# EAGLE board CT_schematic (EAGLE 7.6.0)

Size 100 x 80 mm. Coordinates in mm from the lower left corner, seen from the top.
Outline: 0,0 100,0 100,80 0,80 0,0
Copper layers (1*16): Top 0.035mm / dielectric 1.5mm / Bottom 0.035mm
Design rules "default": minimum track width 10mil, minimum drill 24mil, track to track 8mil, track to pad 8mil, pad to pad 8mil, via to via 8mil, smd to smd 8mil, copper to edge 40mil, drill to drill 8mil, minimum pad ring 10mil, minimum via ring 8mil, stop-mask expansion 4mil, vias tented up to drill 0mil, thermal gap 10mil

## Footprints (pad centres in the part's own frame; a part is rotated, then mirrored left to right if it is on the bottom)
C0603 = smd 0.8 x 0.8: 1 -0.762,0; 2 0.762,0
C0402 = smd 0.5 x 0.5: 1 -0.508,0; 2 0.508,0
C1206 = smd 1.3 x 1.6: 1 -1.524,0; 2 1.524,0
C0805 = smd 1.2 x 1.3: 1 -1.016,0; 2 1.016,0
2220 = smd 1.85 x 5.5: 1 -2.55,0; 2 2.55,0
C1210 = smd 1.2 x 2.5: 1 -1.524,0; 2 1.524,0
EXV-9H = smd 3.505 x 1.676: 1 -2.857,0; 2 2.857,0
L0603 = smd 0.8 x 0.8: 1 -0.762,0; 2 0.762,0
R0603 = smd 0.8 x 0.8: 1 -0.762,0; 2 0.762,0
DR1040 = smd 1.6 x 3.2: 1 -4.458,0; 2 4.458,0
PJ-037B_PACKAGE = drill 3.7 square: 1 12,0 | drill 3.2 square: 2 6,0
UFBGA176_25 = smd 0.3 x 0.3: A1 -4.55,4.55; A2 -3.9,4.55; A3 -3.25,4.55; A4 -2.6,4.55; A5 -1.95,4.55; A6 -1.3,4.55; A7 -0.65,4.55; A8 0,4.55; A9 0.65,4.55; A10 1.3,4.55; A11 1.95,4.55; A12 2.6,4.55; A13 3.25,4.55; A14 3.9,4.55; A15 4.55,4.55; B1 -4.55,3.9; B2 -3.9,3.9; B3 -3.25,3.9; B4 -2.6,3.9; B5 -1.95,3.9; B6 -1.3,3.9; B7 -0.65,3.9; B8 0,3.9; B9 0.65,3.9; B10 1.3,3.9; B11 1.95,3.9; B12 2.6,3.9; B13 3.25,3.9; B14 3.9,3.9; B15 4.55,3.9; C1 -4.55,3.25; C2 -3.9,3.25; C3 -3.25,3.25; C4 -2.6,3.25; C5 -1.95,3.25; C6 -1.3,3.25; C7 -0.65,3.25; C8 0,3.25; C9 0.65,3.25; C10 1.3,3.25; C11 1.95,3.25; C12 2.6,3.25; C13 3.25,3.25; C14 3.9,3.25; C15 4.55,3.25; D1 -4.55,2.6; D2 -3.9,2.6; D3 -3.25,2.6; D4 -2.6,2.6; D5 -1.95,2.6; D6 -1.3,2.6; D7 -0.65,2.6; D8 0,2.6; D9 0.65,2.6; D10 1.3,2.6; D11 1.95,2.6; D12 2.6,2.6; D13 3.25,2.6; D14 3.9,2.6; D15 4.55,2.6; E1 -4.55,1.95; E2 -3.9,1.95; E3 -3.25,1.95; E4 -2.6,1.95; E12 2.6,1.95; E13 3.25,1.95; E14 3.9,1.95; E15 4.55,1.95; F1 -4.55,1.3; F2 -3.9,1.3; F3 -3.25,1.3; F4 -2.6,1.3; F6 -1.3,1.3; F7 -0.65,1.3; F8 0,1.3; F9 0.65,1.3; F10 1.3,1.3; F12 2.6,1.3; F13 3.25,1.3; F14 3.9,1.3; F15 4.55,1.3; G1 -4.55,0.65; G2 -3.9,0.65; G3 -3.25,0.65; G4 -2.6,0.65; G6 -1.3,0.65; G7 -0.65,0.65; G8 0,0.65; G9 0.65,0.65; G10 1.3,0.65; G12 2.6,0.65; G13 3.25,0.65; G14 3.9,0.65; G15 4.55,0.65; H1 -4.55,0; H2 -3.9,0; H3 -3.25,0; H4 -2.6,0; H6 -1.3,0; H7 -0.65,0; H8 0,0; H9 0.65,0; H10 1.3,0; H12 2.6,0; H13 3.25,0; H14 3.9,0; H15 4.55,0; J1 -4.55,-0.65; J2 -3.9,-0.65; J3 -3.25,-0.65; J4 -2.6,-0.65; J6 -1.3,-0.65; J7 -0.65,-0.65; J8 0,-0.65; J9 0.65,-0.65; J10 1.3,-0.65; J12 2.6,-0.65; J13 3.25,-0.65; J14 3.9,-0.65; J15 4.55,-0.65; K1 -4.55,-1.3; K2 -3.9,-1.3; K3 -3.25,-1.3; K4 -2.6,-1.3; K6 -1.3,-1.3; K7 -0.65,-1.3; K8 0,-1.3; K9 0.65,-1.3; K10 1.3,-1.3; K12 2.6,-1.3; K13 3.25,-1.3; K14 3.9,-1.3; K15 4.55,-1.3; L1 -4.55,-1.95; L2 -3.9,-1.95; L3 -3.25,-1.95; L4 -2.6,-1.95; L12 2.6,-1.95; L13 3.25,-1.95; L14 3.9,-1.95; L15 4.55,-1.95; M1 -4.55,-2.6; M2 -3.9,-2.6; M3 -3.25,-2.6; M4 -2.6,-2.6; M5 -1.95,-2.6; M6 -1.3,-2.6; M7 -0.65,-2.6; M8 0,-2.6; M9 0.65,-2.6; M10 1.3,-2.6; M11 1.95,-2.6; M12 2.6,-2.6; M13 3.25,-2.6; M14 3.9,-2.6; M15 4.55,-2.6; N1 -4.55,-3.25; N2 -3.9,-3.25; N3 -3.25,-3.25; N4 -2.6,-3.25; N5 -1.95,-3.25; N6 -1.3,-3.25; N7 -0.65,-3.25; N8 0,-3.25; N9 0.65,-3.25; N10 1.3,-3.25; N11 1.95,-3.25; N12 2.6,-3.25; N13 3.25,-3.25; N14 3.9,-3.25; N15 4.55,-3.25; P1 -4.55,-3.9; P2 -3.9,-3.9; P3 -3.25,-3.9; P4 -2.6,-3.9; P5 -1.95,-3.9; P6 -1.3,-3.9; P7 -0.65,-3.9; P8 0,-3.9; P9 0.65,-3.9; P10 1.3,-3.9; P11 1.95,-3.9; P12 2.6,-3.9; P13 3.25,-3.9; P14 3.9,-3.9; P15 4.55,-3.9; R1 -4.55,-4.55; R2 -3.9,-4.55; R3 -3.25,-4.55; R4 -2.6,-4.55; R5 -1.95,-4.55; R6 -1.3,-4.55; R7 -0.65,-4.55; R8 0,-4.55; R9 0.65,-4.55; R10 1.3,-4.55; R11 1.95,-4.55; R12 2.6,-4.55; R13 3.25,-4.55; R14 3.9,-4.55; R15 4.55,-4.55
TST-110-05-T-D-RA = drill 1 pad 1.7 square: 1 0,0 | drill 1 pad 1.7: 2 0,2.54; 3 2.54,0; 4 2.54,2.54; 5 5.08,0; 6 5.08,2.54; 7 7.62,0; 8 7.62,2.54; 9 10.16,0; 10 10.16,2.54; 11 12.7,0; 12 12.7,2.54; 13 15.24,0; 14 15.24,2.54; 15 17.78,0; 16 17.78,2.54; 17 20.32,0; 18 20.32,2.54; 19 22.86,0; 20 22.86,2.54
TDFN-8/6MM = smd 0.3 x 0.75: 1 0,0; 2 0.5,0; 3 1,0; 4 1.5,0; 5 1.5,3; 6 1,3; 7 0.5,3; 8 0,3
RTL8201FL-VB-CG = smd 0.27 x 1: 1 0,0; 2 0.5,0; 3 1,0; 4 1.5,0; 5 2,0; 6 2.5,0; 7 3,0; 8 3.5,0; 9 4,0; 10 4.5,0; 11 5,0; 12 5.5,0; 25 5.5,8; 26 5,8; 27 4.5,8; 28 4,8; 29 3.5,8; 30 3,8; 31 2.5,8; 32 2,8; 33 1.5,8; 34 1,8; 35 0.5,8; 36 0,8 | smd 1 x 0.27: 13 6.75,1.25; 14 6.75,1.75; 15 6.75,2.25; 16 6.75,2.75; 17 6.75,3.25; 18 6.75,3.75; 19 6.75,4.25; 20 6.75,4.75; 21 6.75,5.25; 22 6.75,5.75; 23 6.75,6.25; 24 6.75,6.75; 37 -1.25,6.75; 38 -1.25,6.25; 39 -1.25,5.75; 40 -1.25,5.25; 41 -1.25,4.75; 42 -1.25,4.25; 43 -1.25,3.75; 44 -1.25,3.25; 45 -1.25,2.75; 46 -1.25,2.25; 47 -1.25,1.75; 48 -1.25,1.25
7498011122R = smd 0.71 x 2.29: 1 -3.545,-3.18; 2 -2.525,-3.18; 3 -1.505,-3.18; 4 -0.485,-3.18; 5 0.535,-3.18; 6 1.555,-3.18; 8 3.595,-3.18; 9 5.635,-3.18; 10 6.655,-3.18; 11 -6.605,-3.18; 12 -5.585,-3.18 | smd 1.4 x 2.54: 13 -8.51,10.2; 14 8.51,10.2 | hole 1.4: -3.5,0; 3.5,0
RHB32_3P45X3P45 = smd 0.85 x 0.28: 1 -2.475,1.75; 2 -2.475,1.25; 3 -2.475,0.75; 4 -2.475,0.25; 5 -2.475,-0.25; 6 -2.475,-0.75; 7 -2.475,-1.25; 8 -2.475,-1.75; 17 2.475,-1.75; 18 2.475,-1.25; 19 2.475,-0.75; 20 2.475,-0.25; 21 2.475,0.25; 22 2.475,0.75; 23 2.475,1.25; 24 2.475,1.75 | smd 0.28 x 0.85: 9 -1.75,-2.475; 10 -1.25,-2.475; 11 -0.75,-2.475; 12 -0.25,-2.475; 13 0.25,-2.475; 14 0.75,-2.475; 15 1.25,-2.475; 16 1.75,-2.475; 25 1.75,2.475; 26 1.25,2.475; 27 0.75,2.475; 28 0.25,2.475; 29 -0.25,2.475; 30 -0.75,2.475; 31 -1.25,2.475; 32 -1.75,2.475 | smd 3.45 x 3.45: 33 0,0
FCI_10118193-0001LF = smd 0.4 x 1.35: 1 -1.3,2.675; 2 -0.65,2.675; 3 0,2.675; 4 0.65,2.675; 5 1.3,2.675 | smd 1.6 x 1.4: 6 -3.2,2.45; 7 3.2,2.45 | smd 1.9 x 1.9: 8 -1.2,0; 9 1.2,0 | hole 0.5: -3.3,0; 3.3,0
SOT143B = smd 1 x 0.7: 1 -0.75,-1 | smd 0.6 x 0.7: 2 0.95,-1; 3 0.95,1; 4 -0.95,1
ABS07-32.768KHZ-7-T = smd 1.1 x 2.4: 1 -2.5,0; 2 0,0
ABLS-25.000MHZ-B2F-T = smd 5.6 x 2.8: 1 -3.81,0; 2 5.69,0
ASFL1 = smd 1.7 x 1.5: 1 -1.27,-1.1; 2 1.27,-1.1; 3 1.27,1.1; 4 -1.27,1.1
WSON-8 = smd 0.3 x 0.6: 1 -0.75,0; 2 0.05,0; 3 0.85,0; 4 1.65,0; 5 1.65,3.8; 6 0.85,3.8; 7 0.05,3.8; 8 -0.75,3.8 | smd 3 x 2.6: PAD 0.45,1.9
QFN-16_EP = smd 0.805 x 0.3: 1 -1.452,0.75; 2 -1.452,0.25; 3 -1.452,-0.25; 4 -1.452,-0.75; 9 1.452,-0.75; 10 1.452,-0.25; 11 1.452,0.25; 12 1.452,0.75 | smd 0.3 x 0.805: 5 -0.75,-1.452; 6 -0.25,-1.452; 7 0.25,-1.452; 8 0.75,-1.452; 13 0.75,1.452; 14 0.25,1.452; 15 -0.25,1.452; 16 -0.75,1.452 | smd 1.55 x 1.55: 17 0,0
SON-6 = smd 0.55 x 0.3: 1 -0.355,0.5 | smd 0.52 x 0.3: 2 -0.37,0; 3 -0.37,-0.5; 4 0.37,-0.5; 5 0.37,0; 6 0.37,0.5
SW_4-1437565-2 = smd 1.4 x 2.1: 1 -2.23,4.55; 2 -2.23,-4.55; 3 2.23,4.55; 4 2.23,-4.55
LGM67K-G1J2-24-Z = smd 0.8 x 1.4: A -2,0; C 0,0
NC7SZ125M5X = smd 1.3 x 0.7: 1 -1.3,0.95; 2 -1.3,0; 3 -1.3,-0.95; 4 1.3,-0.95; 5 1.3,0.95

## Placement (x,y rotation side)
C1  1e-06  [C0603]  -40.64,80.01 0 top  (outside the outline)
C2  1e-07  [C0603]  -44.45,80.01 0 top  (outside the outline)
C3  1e-07  [C0603]  -48.26,80.01 0 top  (outside the outline)
C4  1e-07  [C0603]  -52.07,80.01 0 top  (outside the outline)
C5  1e-07  [C0603]  -55.88,80.01 0 top  (outside the outline)
C6  1e-07  [C0603]  -59.69,80.01 0 top  (outside the outline)
C7  1e-07  [C0603]  -63.5,80.01 0 top  (outside the outline)
C8  1e-07  [C0603]  -67.31,80.01 0 top  (outside the outline)
C9  1e-07  [C0603]  -71.12,80.01 0 top  (outside the outline)
C10  1e-07  [C0603]  -74.93,80.01 0 top  (outside the outline)
C11  1e-07  [C0603]  -78.74,80.01 0 top  (outside the outline)
C12  1e-07  [C0603]  -82.55,80.01 0 top  (outside the outline)
C13  1e-07  [C0603]  -86.36,80.01 0 top  (outside the outline)
C14  1e-07  [C0603]  -15.24,85.09 0 top  (outside the outline)
C15  1e-07  [C0603]  -19.05,85.09 0 top  (outside the outline)
C16  1e-07  [C0603]  -22.86,85.09 0 top  (outside the outline)
C17  4.7e-06  [C0603]  -29.21,80.01 0 top  (outside the outline)
C18  1e-08  [C0603]  -26.67,85.09 0 top  (outside the outline)
C19  1e-06  [C0603]  -30.48,85.09 0 top  (outside the outline)
C20  1e-07  [C0402]  -64.77,90.17 0 top  (outside the outline)
C21  1e-07  [C0402]  -68.58,90.17 0 top  (outside the outline)
C22  1e-11  [C0402]  -72.39,90.17 0 top  (outside the outline)
C23  1e-11  [C0402]  -76.2,90.17 0 top  (outside the outline)
C24  1e-11  [C0402]  -80.01,90.17 0 top  (outside the outline)
C25  1e-11  [C0402]  -83.82,90.17 0 top  (outside the outline)
C26  1e-07  [C0402]  -87.63,90.17 0 top  (outside the outline)
C27  1e-08  [C0402]  -15.24,95.25 0 top  (outside the outline)
C28  2.2e-08  [C0402]  -60.96,90.17 0 top  (outside the outline)
C29  1e-06  [C0603]  -34.29,85.09 0 top  (outside the outline)
C30  1e-07  [C0402]  -19.05,95.25 0 top  (outside the outline)
C31  1e-08  [C0402]  -22.86,95.25 0 top  (outside the outline)
C32  1e-06  [C0603]  -38.1,85.09 0 top  (outside the outline)
C33  1e-07  [C0402]  -26.67,95.25 0 top  (outside the outline)
C34  1e-08  [C0402]  -30.48,95.25 0 top  (outside the outline)
C35  1e-07  [C0402]  -34.29,95.25 0 top  (outside the outline)
C36  1e-07  [C0402]  -38.1,95.25 0 top  (outside the outline)
C37  1e-07  [C0402]  -41.91,95.25 0 top  (outside the outline)
C38  2.2e-06  [C0603]  -33.02,80.01 0 top  (outside the outline)
C39  1e-07  [C0402]  -45.72,95.25 0 top  (outside the outline)
C40  1e-07  [C0402]  -49.53,95.25 0 top  (outside the outline)
C41  2.2e-06  [C0603]  -36.83,80.01 0 top  (outside the outline)
C42  1e-06  [C0603]  -41.91,85.09 0 top  (outside the outline)
C43  1e-08  [C0402]  -53.34,95.25 0 top  (outside the outline)
C44  1e-08  [C0402]  -57.15,95.25 0 top  (outside the outline)
C45  1e-08  [C0402]  -60.96,95.25 0 top  (outside the outline)
C46  1e-05  [C1206]  -85.09,60.96 0 top  (outside the outline)
C47  1e-05  [C0805]  -46.99,68.58 0 top  (outside the outline)
C48  1e-05  [C0805]  -52.07,68.58 0 top  (outside the outline)
C49  1e-06  [C0603]  -45.72,85.09 0 top  (outside the outline)
C50  1e-07  [C0402]  -64.77,95.25 0 top  (outside the outline)
C51  6.8e-05  [2220]  -62.23,33.02 0 top  (outside the outline)
C52  1e-08  [C0402]  -68.58,95.25 0 top  (outside the outline)
C53  1e-05  [C1206]  -16.51,68.58 0 top  (outside the outline)
C54  1e-05  [C1210]  -78.74,60.96 0 top  (outside the outline)
C55  1e-07  [C0402]  -72.39,95.25 0 top  (outside the outline)
C56  0.0001  [EXV-9H]  -54.61,53.34 0 top  (outside the outline)
C57  0.0001  [EXV-9H]  -66.04,53.34 0 top  (outside the outline)
C58  1e-08  [C0402]  -76.2,95.25 0 top  (outside the outline)
C59  1e-08  [C0402]  -80.01,95.25 0 top  (outside the outline)
C60  1e-08  [C0402]  -83.82,95.25 0 top  (outside the outline)
C61  1e-08  [C0402]  -87.63,95.25 0 top  (outside the outline)
F1  240.0  [L0603]  -49.53,85.09 0 top  (outside the outline)
I1  97.0  [R0603]  -53.34,85.09 0 top  (outside the outline)
I5  3.8e-06  [DR1040]  -38.1,34.29 0 top  (outside the outline)
J1  PJ-037B  [PJ-037B_PACKAGE]  -77.47,7.62 0 top  (outside the outline)
R2  1000.0  [R0603]  -57.15,85.09 0 top  (outside the outline)
R4  4700.0  [R0603]  -60.96,85.09 0 top  (outside the outline)
R5  4700.0  [R0603]  -64.77,85.09 0 top  (outside the outline)
R6  4700.0  [R0603]  -68.58,85.09 0 top  (outside the outline)
R7  2200.0  [R0603]  -72.39,85.09 0 top  (outside the outline)
R8  2200.0  [R0603]  -76.2,85.09 0 top  (outside the outline)
R9  2200.0  [R0603]  -80.01,85.09 0 top  (outside the outline)
R10  2200.0  [R0603]  -83.82,85.09 0 top  (outside the outline)
R11  10000.0  [R0603]  -82.55,68.58 0 top  (outside the outline)
R12  10000.0  [R0603]  -15.24,74.93 0 top  (outside the outline)
R13  10000.0  [R0603]  -20.32,74.93 0 top  (outside the outline)
R14  10000.0  [R0603]  -25.4,74.93 0 top  (outside the outline)
R15  10000.0  [R0603]  -30.48,74.93 0 top  (outside the outline)
R16  10000.0  [R0603]  -35.56,74.93 0 top  (outside the outline)
R17  0.1  [R0603]  -15.24,90.17 0 top  (outside the outline)
R18  0.1  [R0603]  -19.05,90.17 0 top  (outside the outline)
R19  200.0  [R0603]  -22.86,90.17 0 top  (outside the outline)
R20  200.0  [R0603]  -26.67,90.17 0 top  (outside the outline)
R21  2490.0  [R0603]  -30.48,90.17 0 top  (outside the outline)
R22  4700.0  [R0603]  -34.29,90.17 0 top  (outside the outline)
R23  10000.0  [R0603]  -40.64,74.93 0 top  (outside the outline)
R24  10000.0  [R0603]  -45.72,74.93 0 top  (outside the outline)
R25  10000.0  [R0603]  -50.8,74.93 0 top  (outside the outline)
R26  10000.0  [R0603]  -55.88,74.93 0 top  (outside the outline)
R27  10000.0  [R0603]  -60.96,74.93 0 top  (outside the outline)
R28  10000.0  [R0603]  -66.04,74.93 0 top  (outside the outline)
R29  10000.0  [R0603]  -71.12,74.93 0 top  (outside the outline)
R30  10000.0  [R0603]  -76.2,74.93 0 top  (outside the outline)
R31  100000.0  [R0603]  -57.15,68.58 0 top  (outside the outline)
R32  200.0  [R0603]  -38.1,90.17 0 top  (outside the outline)
R33  1000.0  [R0603]  -41.91,90.17 0 top  (outside the outline)
R34  20000.0  [R0603]  -81.28,74.93 0 top  (outside the outline)
R35  39000.0  [R0603]  -86.36,74.93 0 top  (outside the outline)
R36  300000.0  [R0603]  -62.23,68.58 0 top  (outside the outline)
R37  100000.0  [R0603]  -67.31,68.58 0 top  (outside the outline)
R38  2231.0  [R0603]  -45.72,90.17 0 top  (outside the outline)
R39  1000.0  [R0603]  -49.53,90.17 0 top  (outside the outline)
R40  10000.0  [R0603]  -15.24,80.01 0 top  (outside the outline)
R41  10000.0  [R0603]  -20.32,80.01 0 top  (outside the outline)
R42  82000.0  [R0603]  -25.4,80.01 0 top  (outside the outline)
R43  300000.0  [R0603]  -72.39,68.58 0 top  (outside the outline)
R44  120000.0  [R0603]  -77.47,68.58 0 top  (outside the outline)
U1  STM32F207IFH6  [UFBGA176_25]  -38.1,6.35 0 top  (outside the outline)
U2  TST-110-05-T-D-RA  [TST-110-05-T-D-RA]  -46.99,52.07 0 top  (outside the outline)
U3  24AA64T-I/MNY  [TDFN-8/6MM]  -54.61,33.02 0 top  (outside the outline)
U4  RTL8201FL-VB-CG  [RTL8201FL-VB-CG]  -60.96,3.81 0 top  (outside the outline)
U5  7498011122R  [7498011122R]  -22.86,7.62 0 top  (outside the outline)
U6  TUSB1210BRHBR  [RHB32_3P45X3P45]  -38.1,62.23 0 top  (outside the outline)
U7  10118193-0001LF  [FCI_10118193-0001LF]  -72.39,44.45 0 top  (outside the outline)
U8  prtr5v0u2ax  [SOT143B]  -24.13,100.33 0 top  (outside the outline)
U9  ABS07-32.768KHZ-7-T  [ABS07-32.768KHZ-7-T]  -58.42,62.23 0 top  (outside the outline)
U10  ABLS-25.000MHZ-B2F-T  [ABLS-25.000MHZ-B2F-T]  -26.67,62.23 0 top  (outside the outline)
U11  ASFL1-25MHZ-NCS  [ASFL1]  -46.99,44.45 0 top  (outside the outline)
U12  ASFL1-26MHZ-NCS  [ASFL1]  -63.5,44.45 0 top  (outside the outline)
U13  LP3878SDX-ADJ/NOPB  [WSON-8]  -83.82,31.75 0 top  (outside the outline)
U14  LTC3601EUD#PBF  [QFN-16_EP]  -54.61,90.17 0 top  (outside the outline)
U15  LP3878SDX-ADJ/NOPB  [WSON-8]  -30.48,43.18 0 top  (outside the outline)
U16  TPS3895ADRYR  [SON-6]  -27.94,99.06 0 top  (outside the outline)
U17  4-1437565-2  [SW_4-1437565-2]  -27.94,34.29 0 top  (outside the outline)
U18  Q65110A2395  [LGM67K-G1J2-24-Z]  -67.31,62.23 0 top  (outside the outline)
U19  nc7sz125m5x  [NC7SZ125M5X]  -21.59,68.58 0 top  (outside the outline)
U20  nc7sz125m5x  [NC7SZ125M5X]  -27.94,68.58 0 top  (outside the outline)
U21  nc7sz125m5x  [NC7SZ125M5X]  -34.29,68.58 0 top  (outside the outline)
U22  nc7sz125m5x  [NC7SZ125M5X]  -40.64,68.58 0 top  (outside the outline)

## Library data of the parts
C1-C61 F1 I1 I5 J1 R2 R4-R44 U1-U22 = circuit_tree

## Nets
CLK_CRYSTAL_U1_E1: C22.1 U1.E1 U9.1
CLK_CRYSTAL_U1_F1: C23.1 U1.F1 U9.2
CLK_CRYSTAL_U1_G1: C24.1 U1.G1 U10.1
CLK_CRYSTAL_U1_H1: C25.1 U1.H1 U10.2
CLK_U4_43: U4.43 U11.3
CLK_U6_1: U6.1 U12.3
GND: C1.2 C2.2 C3.2 C4.2 C5.2 C6.2 C7.2 C8.2 C9.2 C10.2 C11.2 C12.2 C13.2 C14.2 C15.2 C16.2 C17.2 C18.2 C19.2 C20.2 C21.2 C22.2 C23.2 C24.2 C25.2 C26.2 C27.2 C28.2 C29.2 C30.2 C31.2 C32.2 C33.2 C34.2 C35.2 C36.2 C37.2 C38.2 C39.2 C40.2 C41.2 C42.2 C43.2 C44.2 C45.2 C46.2 C47.2 C48.2 C49.2 C51.1 C51.2 C52.2 C53.2 C54.2 C55.2 C56.2 C57.2 C58.2 C59.2 C60.2 C61.2 J1.2 R2.2 R11.2 R14.2 R16.2 R17.2 R18.2 R21.2 R23.2 R24.2 R26.2 R33.2 R34.2 R36.2 R39.2 R42.2 R44.2 U1.D5 U1.D7 U1.D8 U1.D9 U1.F2 U1.F6 U1.F7 U1.F8 U1.F9 U1.F10 U1.F12 U1.G2 U1.G6 U1.G7 U1.G8 U1.G9 U1.G10 U1.G12 U1.H6 U1.H7 U1.H8 U1.H9 U1.H10 U1.H12 U1.J6 U1.J7 U1.J8 U1.J9 U1.J10 U1.K6 U1.K7 U1.K8 U1.K9 U1.K10 U1.M1 U1.M8 U1.M9 U1.N1 U2.4 U2.6 U2.8 U2.10 U2.12 U2.14 U2.16 U2.18 U2.20 U3.4 U3.7 U4.7 U4.20 U4.33 U4.42 U4.47 U5.9 U6.33 U7.5 U7.6 U7.7 U7.8 U7.9 U8.1 U11.2 U12.2 U13.3 U13.PAD U14.1 U14.9 U14.17 U15.3 U15.PAD U16.2 U18.C U19.2 U19.3 U20.1 U20.3 U21.1 U21.3 U22.1 U22.3
NET_U1_A5: R7.1 U1.A5 U3.6
NET_U1_B4: R8.1 U1.B4 U3.5
NET_U1_D6: R11.1 U1.D6
NET_U1_F13: C21.1 U1.F13
NET_U1_J1: R5.1 U1.J1 U21.4
NET_U1_L4: R12.1 U1.L4
NET_U1_M3: R9.1
NET_U1_P2: R10.1
NET_U1_R1: C18.1 C19.1 F1.1 U1.P1 U1.R1
NET_U1_R14: U18.A
NET_U1_R15: U17.3 U17.4
NET_U3_1: R14.1 U3.1
NET_U3_2: R15.1 U3.2
NET_U3_3: R16.1 U3.3
NET_U4_6: C29.1 C30.1 C31.1 I1.1 U4.6 U4.41
NET_U4_10: R26.1 U4.10
NET_U4_13: R23.1 U4.13
NET_U4_18: R27.1 U4.18
NET_U4_28: U4.28
NET_U4_29: R4.1 U4.29 U20.4
NET_U4_32: R22.1 U4.32
NET_U4_34: R24.1 U4.34
NET_U4_35: R25.1 U4.35
NET_U4_39: R28.1 U4.39
NET_U4_40: C36.1 U4.40
NET_U4_46: R21.1 U4.46
NET_U4_48: C35.1 U4.48
NET_U5_1: U4.1 U5.1
NET_U5_3: U4.2 U5.3
NET_U5_4: U4.4 U5.4
NET_U5_5: C28.1 U5.2 U5.5
NET_U5_6: U4.5 U5.6
NET_U5_8: R18.1 U5.8
NET_U5_10: R19.1 U5.10
NET_U5_12: R20.1 U5.12
NET_U5_13: R17.1 U5.13 U5.14
NET_U5_34: R19.2
NET_U5_35: R20.2
NET_U6_11: R29.1 U6.11
NET_U6_12: C41.1 U6.12
NET_U6_14: R30.1 U6.14
NET_U6_20: C38.1 U6.20
NET_U6_27: R6.1 U6.27 U22.4
NET_U7_1: C42.1 U6.22 U7.1 U8.4
NET_U7_2: U6.19 U7.2 U8.3
NET_U7_3: U6.18 U7.3 U8.2
NET_U13_1: C45.1 U13.1
NET_U13_6: R32.2 R33.1 U13.6
NET_U13_8: R31.1 U13.8
NET_U14_3: C50.2 I5.1 U14.3 U14.4
NET_U14_6: C50.1 U14.6
NET_U14_7: C49.1 U14.7 U14.12
NET_U14_10: R36.1 U14.10
NET_U14_11: R34.1 R35.1 U14.11
NET_U14_14: U14.14
NET_U14_ATNET_3: I5.2 R35.2
NET_U15_1: C52.1 U15.1
NET_U15_6: R38.2 R39.1 U15.6
NET_U15_8: R37.1 U15.8
NET_U16_1: R41.1 R42.1 U16.1
NET_U16_3: R43.2 R44.1 U16.3
NET_U16_4: R40.1 U16.4 U19.4 U20.2 U21.2 U22.2
NET_U17_1: R2.1 U17.1 U17.2
PROC_SYS_JTCK_SWCLK: U1.A14 U2.9
PROC_SYS_JTDO_SWO: U1.A10 U2.13
PROC_SYS_JTMS_SWDIO: U1.A15 U2.7
PROC_USB_OTG_HS_ULPI_CK: U1.P4 U6.26
PROC_USB_OTG_HS_ULPI_D0: U1.R2 U6.3
PROC_USB_OTG_HS_ULPI_D1: U1.R5 U6.4
PROC_USB_OTG_HS_ULPI_D2: U1.R4 U6.5
PROC_USB_OTG_HS_ULPI_D3: U1.R12 U6.6
PROC_USB_OTG_HS_ULPI_D4: U1.R13 U6.7
PROC_USB_OTG_HS_ULPI_D5: U1.P12 U6.9
PROC_USB_OTG_HS_ULPI_D6: U1.P13 U6.10
PROC_USB_OTG_HS_ULPI_D7: U1.A6 U6.13
PROC_USB_OTG_HS_ULPI_DIR: U1.E4 U6.31
PROC_USB_OTG_HS_ULPI_NXT: U1.H4 U6.2
PROC_USB_OTG_HS_ULPI_STP: U1.M2 U6.29
RST_OUT_U2_SRESET_B: R13.1 U2.15 U19.1
VCC_S1_9V8: C46.1 C48.1 C53.1 C56.1 C57.1 J1.1 R31.2 R37.2 U13.4 U14.15 U14.16 U15.4
VCC_TIER1_1V2: C20.1 C47.1 R32.1 U1.M10 U13.5
VCC_TIER1_1V8: C1.1 C2.1 C3.1 C4.1 C5.1 C6.1 C7.1 C8.1 C9.1 C10.1 C11.1 C12.1 C13.1 C14.1 C15.1 C16.1 C17.1 C26.1 C27.1 C39.1 C40.1 C51.2 C55.1 C58.1 C59.1 C60.1 C61.1 F1.2 I5.2 R5.2 R6.2 R7.2 R8.2 R9.2 R10.2 R12.2 R13.2 R15.2 R29.2 R30.2 R35.2 R40.2 R41.2 R43.1 U1.C1 U1.C5 U1.C7 U1.C8 U1.C9 U1.F3 U1.G3 U1.G13 U1.H13 U1.J12 U1.J13 U1.K4 U1.N8 U1.N9 U1.N10 U2.1 U3.8 U6.28 U6.30 U6.32 U14.8 U16.6 U19.5 U20.5 U21.5 U22.5
VCC_TIER1_3V3: C32.1 C33.1 C34.1 C37.1 C43.1 C44.1 C54.1 I1.2 R4.2 R22.2 R25.2 R27.2 R28.2 R38.1 U4.15 U4.21 U4.37 U6.21 U11.4 U12.4 U15.5

## Tracks (layer width: path | path; a pad name or v marks a point on that pad's centre or on a via)
CLK_CRYSTAL_U1_E1  (2 unrouted)
CLK_CRYSTAL_U1_F1  (2 unrouted)
CLK_CRYSTAL_U1_G1  (2 unrouted)
CLK_CRYSTAL_U1_H1  (2 unrouted)
CLK_U4_43  (1 unrouted)
CLK_U6_1  (1 unrouted)
GND  (158 unrouted)
NET_U1_A5  (2 unrouted)
NET_U1_B4  (2 unrouted)
NET_U1_D6  (1 unrouted)
NET_U1_F13  (1 unrouted)
NET_U1_J1  (2 unrouted)
NET_U1_L4  (1 unrouted)
NET_U1_R1  (4 unrouted)
NET_U1_R15  (1 unrouted)
NET_U3_1  (1 unrouted)
NET_U3_2  (1 unrouted)
NET_U3_3  (1 unrouted)
NET_U4_6  (5 unrouted)
NET_U4_10  (1 unrouted)
NET_U4_13  (1 unrouted)
NET_U4_18  (1 unrouted)
NET_U4_29  (2 unrouted)
NET_U4_32  (1 unrouted)
NET_U4_34  (1 unrouted)
NET_U4_35  (1 unrouted)
NET_U4_39  (1 unrouted)
NET_U4_40  (1 unrouted)
NET_U4_46  (1 unrouted)
NET_U4_48  (1 unrouted)
NET_U5_1  (1 unrouted)
NET_U5_3  (1 unrouted)
NET_U5_4  (1 unrouted)
NET_U5_5  (2 unrouted)
NET_U5_6  (1 unrouted)
NET_U5_8  (1 unrouted)
NET_U5_10  (1 unrouted)
NET_U5_12  (1 unrouted)
NET_U5_13  (2 unrouted)
NET_U6_11  (1 unrouted)
NET_U6_12  (1 unrouted)
NET_U6_14  (1 unrouted)
NET_U6_20  (1 unrouted)
NET_U6_27  (2 unrouted)
NET_U7_1  (3 unrouted)
NET_U7_2  (2 unrouted)
NET_U7_3  (2 unrouted)
NET_U13_1  (1 unrouted)
NET_U13_6  (2 unrouted)
NET_U13_8  (1 unrouted)
NET_U14_3  (3 unrouted)
NET_U14_6  (1 unrouted)
NET_U14_7  (2 unrouted)
NET_U14_10  (1 unrouted)
NET_U14_11  (2 unrouted)
NET_U14_ATNET_3  (1 unrouted)
NET_U15_1  (1 unrouted)
NET_U15_6  (2 unrouted)
NET_U15_8  (1 unrouted)
NET_U16_1  (2 unrouted)
NET_U16_3  (2 unrouted)
NET_U16_4  (5 unrouted)
NET_U17_1  (2 unrouted)
PROC_SYS_JTCK_SWCLK  (1 unrouted)
PROC_SYS_JTDO_SWO  (1 unrouted)
PROC_SYS_JTMS_SWDIO  (1 unrouted)
PROC_USB_OTG_HS_ULPI_CK  (1 unrouted)
PROC_USB_OTG_HS_ULPI_D0  (1 unrouted)
PROC_USB_OTG_HS_ULPI_D1  (1 unrouted)
PROC_USB_OTG_HS_ULPI_D2  (1 unrouted)
PROC_USB_OTG_HS_ULPI_D3  (1 unrouted)
PROC_USB_OTG_HS_ULPI_D4  (1 unrouted)
PROC_USB_OTG_HS_ULPI_D5  (1 unrouted)
PROC_USB_OTG_HS_ULPI_D6  (1 unrouted)
PROC_USB_OTG_HS_ULPI_D7  (1 unrouted)
PROC_USB_OTG_HS_ULPI_DIR  (1 unrouted)
PROC_USB_OTG_HS_ULPI_NXT  (1 unrouted)
PROC_USB_OTG_HS_ULPI_STP  (1 unrouted)
RST_OUT_U2_SRESET_B  (2 unrouted)
VCC_S1_9V8  (11 unrouted)
VCC_TIER1_1V2  (4 unrouted)
VCC_TIER1_1V8  (69 unrouted)
VCC_TIER1_3V3  (20 unrouted)